# EAGLE board SenseoControl (EAGLE 6.1)
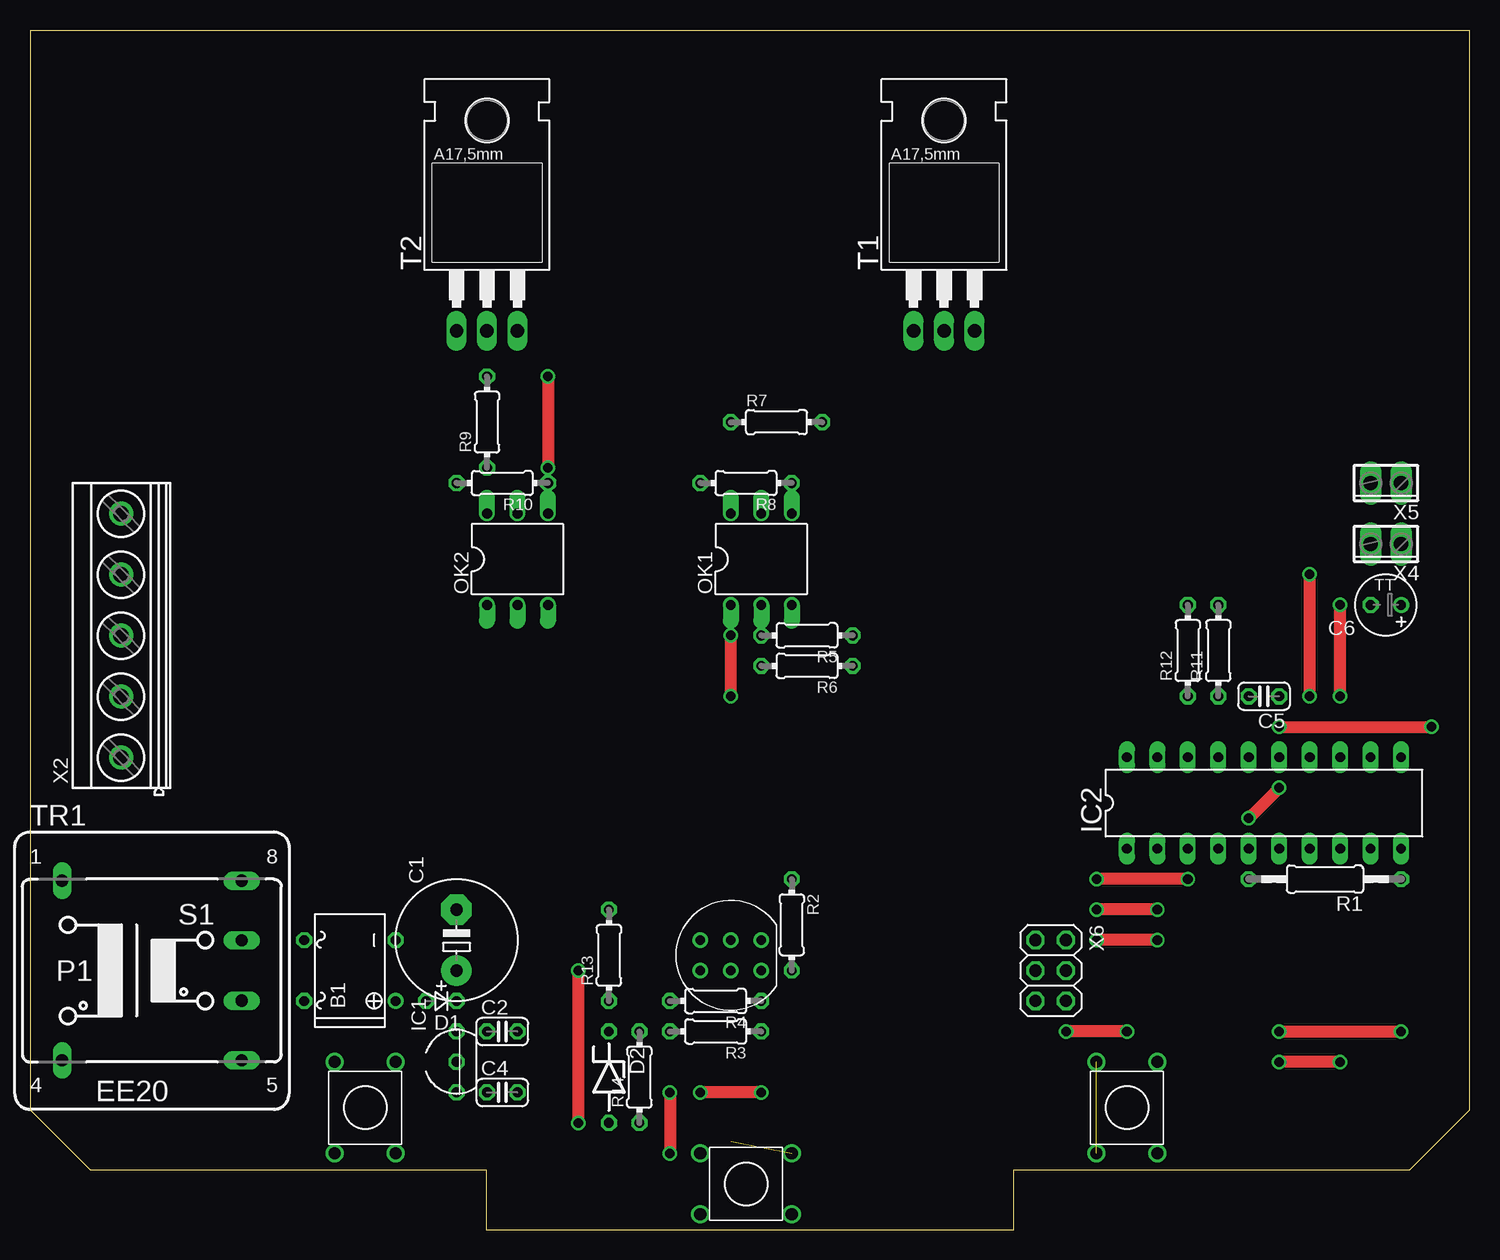
[diagram p0: board, top side]
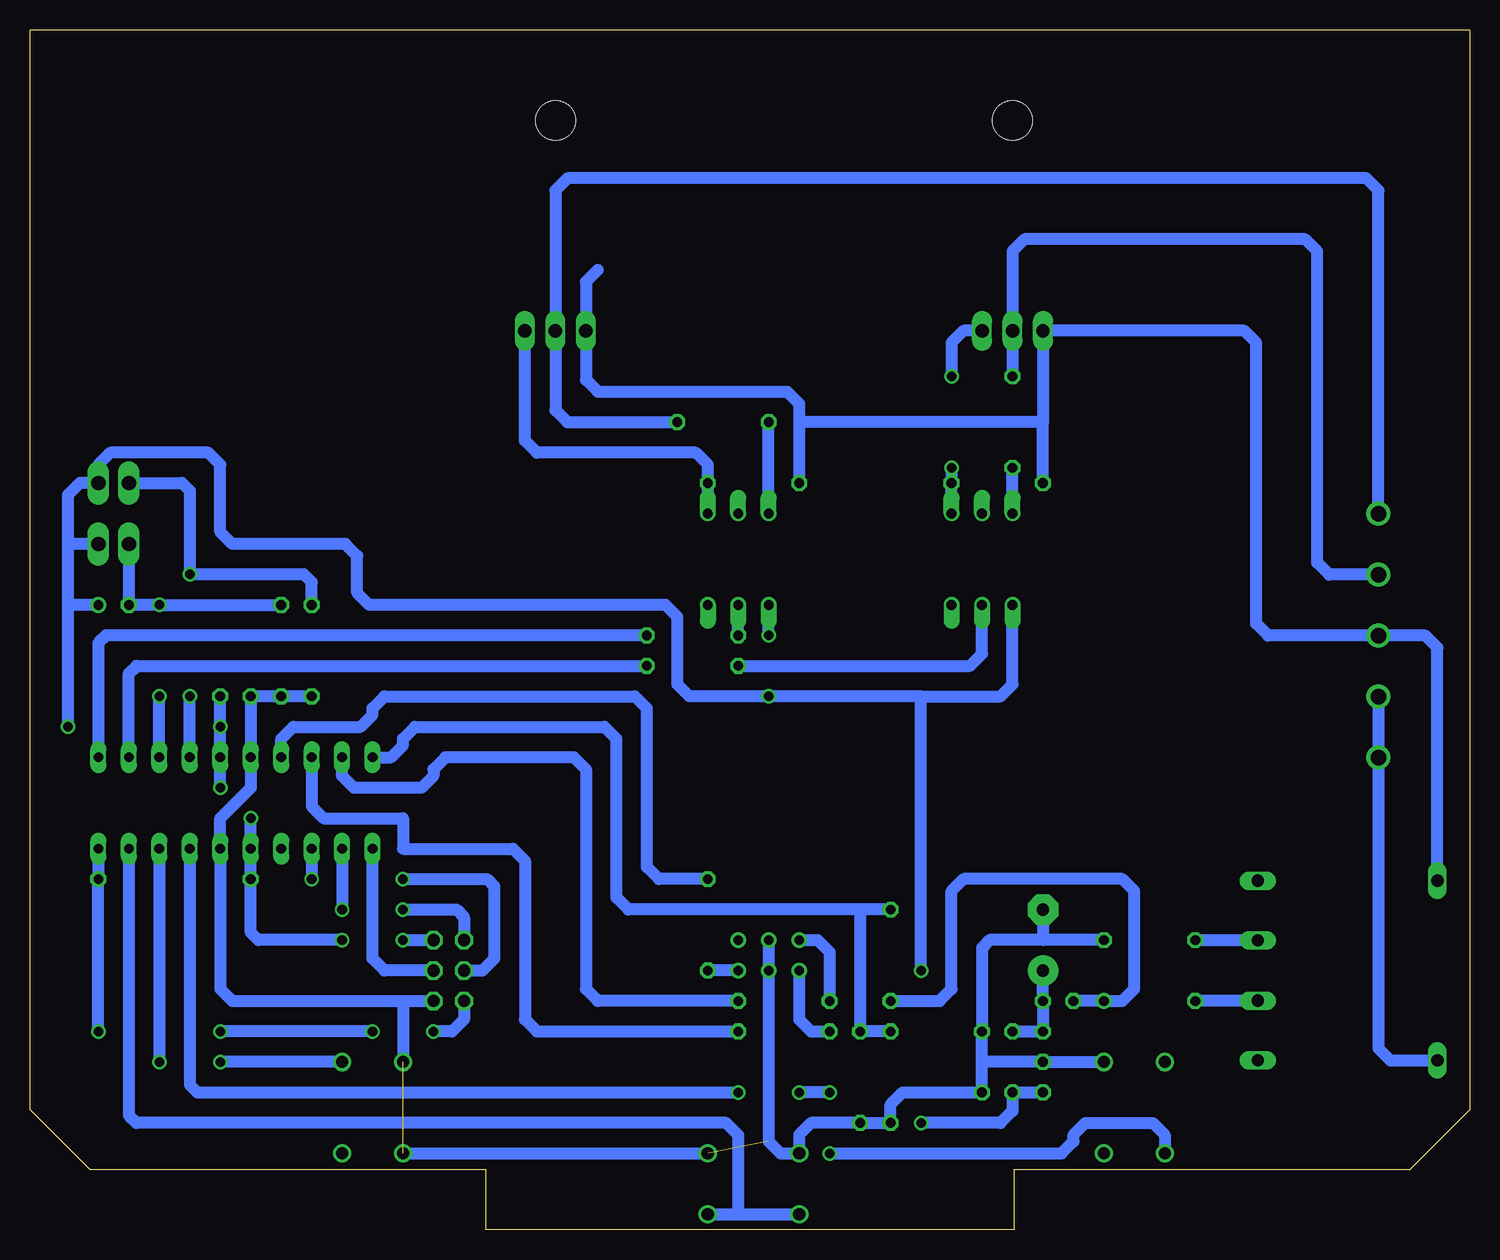
[diagram p1: board, bottom side, seen from below]

Size 120 x 100 mm. Coordinates in mm from the lower left corner, seen from the top.
Outline: 5,5 38,5 38,0 82,0 82,5 115,5 120,10 120,100 0,100 0,10 5,5
Copper layers (1*16): Top 0.035mm / dielectric 1.5mm / Bottom 0.035mm
Design rules: minimum track width 10mil, minimum drill 24mil, track to track 8mil, track to pad 8mil, pad to pad 8mil, via to via 8mil, smd to smd 8mil, copper to edge 40mil, drill to drill 8mil, minimum pad ring 10mil, minimum via ring 8mil, stop-mask expansion 4mil, vias tented up to drill 0mil, thermal gap 10mil
vRestrict: area 76.2,34.3 to 83.8,36.8; area 33,34.3 to 40.6,36.8

## Footprints (pad centres in the part's own frame; a part is rotated, then mirrored left to right if it is on the bottom)
B-DIL = drill 0.813: + -2.54,-3.81 | drill 0.813 octagon: - 2.54,-3.81; AC1 2.54,3.81; AC2 -2.54,3.81
E5-10,5 = drill 1.016 pad 2.54: + -2.54,0 | drill 1.016 pad 2.54 octagon: - 2.54,0
C025-024X044 = drill 0.813 octagon: 1 -1.27,0; 2 1.27,0
TT2D5 = drill 0.813: + -1.27,0 | drill 0.813 octagon: - 1.27,0
D-2.5 = drill 0.813 octagon: A 1.27,0; C -1.27,0
ZDIO-7.5 = drill 0.813 octagon: A 3.81,0; C -3.81,0
TO92-A = drill 0.813 octagon: 1 -2.54,0; 2 0,0; 3 2.54,0
DIL20 = drill 0.813 long: 1 -11.43,-3.81; 2 -8.89,-3.81; 3 -6.35,-3.81; 4 -3.81,-3.81; 5 -1.27,-3.81; 6 1.27,-3.81; 7 3.81,-3.81; 8 6.35,-3.81; 9 8.89,-3.81; 10 11.43,-3.81; 11 11.43,3.81; 12 8.89,3.81; 13 6.35,3.81; 14 3.81,3.81; 15 1.27,3.81; 16 -1.27,3.81; 17 -3.81,3.81; 18 -6.35,3.81; 19 -8.89,3.81; 20 -11.43,3.81
LF5 = drill 0.8: 1 1.27,2.54; 2 1.27,-2.54; 3 -1.27,-2.54; 4 -1.27,2.54; 5 1.27,0; 6 -1.27,0
DIL06 = drill 0.813 offset: 1 -2.54,-3.81; 2 0,-3.81; 3 2.54,-3.81; 4 2.54,3.81; 5 0,3.81; 6 -2.54,3.81
0207/12 = drill 0.813 octagon: 1 -6.35,0; 2 6.35,0
0204/7 = drill 0.813 octagon: 1 -3.81,0; 2 3.81,0
B3F-10XX-A = drill 1.016: 1 -3.81,2.54; 2 3.81,2.54; 3 -3.81,-2.54; 4 3.81,-2.54
TO220AB = drill 1.118 long: 1 -2.54,-6.35; 2 0,-6.35; 3 2.54,-6.35 | hole 3.302: 0,11.176
EE20-1 = drill 1.016 long: 1 -7.493,7.493; 4 -7.493,-7.493; 5 7.493,-7.493; 6 7.493,-2.515; 7 7.493,2.515; 8 7.493,7.493
MKDSN1,5/5-5,08 = drill 1.3 pad 2: 1 -10.181,0.025; 2 -5.101,0.025; 3 -0.021,0.025; 4 5.059,0.025; 5 10.139,0.025
2POL254 = drill 1.2 long: 1 -1.27,0; 2 1.27,0
2X03 = drill 1.016 octagon: 1 -2.54,-1.27; 2 -2.54,1.27; 3 0,-1.27; 4 0,1.27; 5 2.54,-1.27; 6 2.54,1.27

## Placement (x,y rotation side)
B1  B500D  [B-DIL]  26.67,21.59 90 top
C1  470µ  [E5-10,5]  35.56,24.13 90 top
C2  100n  [C025-024X044]  39.37,16.51 0 top
C4  100n  [C025-024X044]  39.37,11.43 0 top
C5  100n  [C025-024X044]  102.87,44.45 180 top
C6  1µ  [TT2D5]  113.03,52.07 180 top
D1  1N4004  [D-2.5]  34.29,19.05 180 top
D2  5V1  [ZDIO-7.5]  48.26,12.7 270 top
IC1  78L05  [TO92-A]  35.56,13.97 90 top
IC2  TINY26P  [DIL20]  102.87,35.56 0 top
LED1  LF5  [LF5]  58.42,22.86 270 top
OK1  MOC3031M  [DIL06]  60.96,55.88 0 top
OK2  MOC3031M  [DIL06]  40.64,55.88 0 top
R1  10k  [0207/12]  107.95,29.21 180 top
R2  150  [0204/7]  63.5,25.4 270 top
R3  20  [0204/7]  57.15,16.51 180 top
R4  120  [0204/7]  57.15,19.05 180 top
R5  150  [0204/7]  64.77,49.53 180 top
R6  150  [0204/7]  64.77,46.99 180 top
R7  1k  [0204/7]  62.23,67.31 0 top
R8  1k  [0204/7]  59.69,62.23 180 top
R9  1k  [0204/7]  38.1,67.31 90 top
R10  1k  [0204/7]  39.37,62.23 180 top
R11  10k  [0204/7]  99.06,48.26 90 top
R12  1k  [0204/7]  96.52,48.26 90 top
R13  100k  [0204/7]  48.26,22.86 90 top
R14  100k  [0204/7]  50.8,12.7 90 top
S1  POWER  [B3F-10XX-A]  59.69,3.81 0 top
S2  1 CUP  [B3F-10XX-A]  91.44,10.16 90 top
S3  2 CUPS  [B3F-10XX-A]  27.94,10.16 270 top
T1  BT136  [TO220AB]  76.2,81.28 0 top
T2  BT136  [TO220AB]  38.1,81.28 0 top
TR1  230V/6V 0.35VA  [EE20-1]  10.16,21.59 0 top
X2  MKDSN1,5/5-5,08  [MKDSN1,5/5-5,08]  7.62,49.53 90 top
X4  Hall-Switch  [2POL254]  113.03,57.15 180 top
X5  NTC  [2POL254]  113.03,62.23 180 top
X6  ISP  [2X03]  85.09,21.59 270 top

## Library data of the parts
B1 = rectifier
C1 C2 C4-C6 R1-R14 = resistor
D1 D2 = diode
IC1 = linear
IC2 = atmel; MPN: ATTINY261-20PU; OC_FARNELL: 1455146; OC_NEWARK: 58M3782
LED1 = led-rgb
OK1 OK2 = optocoupler; MF: FAIRCHILD SEMICONDUCTOR; MPN: MOC3031M; OC_FARNELL: 9875964; OC_NEWARK: 78K6089
S1-S3 = switch-omron
T1 T2 = triac
TR1 = trafo
X2 = con-phoenix-508; MPN: SMKDSN1,5/5-5,08; OC_FARNELL: 1792906; OC_NEWARK: 70R0301
X4 X5 = con-phoenix-254; OC_FARNELL: unknown; OC_NEWARK: unknown
X6 = pinhead

## Nets
!RESET: IC2.10 R1.1 X6.5
BLACK: R9.2 T2.2 X2.4
BLUE: R8.2 R10.2 T1.1 T2.1 TR1.1 X2.3
BROWN: TR1.4 X2.1 X2.2
GND: B1.- C1.- C2.2 C4.2 C5.2 D2.A IC1.2 IC2.6 IC2.16 LED1.5 LED1.6 R11.1 R12.1 R14.1 S1.1 S1.2 S2.1 S2.2 S3.1 X6.6
MISO: IC2.2 X6.1
MOSI: IC2.1 X6.4
N$1: LED1.2 R3.2
N$2: B1.AC1 TR1.7
N$3: OK1.4 R8.1 T1.3
N$4: B1.AC2 TR1.6
N$5: IC2.18 R3.1
N$6: D2.C IC2.20 R13.2 R14.2
N$7: C1.+ C2.1 D1.C IC1.3
N$8: IC2.7 S3.4
N$9: IC2.8 S2.4
N$10: IC2.9 S1.3 S1.4
N$11: IC2.17 R2.1
N$12: LED1.3 R4.2
N$13: LED1.1 R2.2
N$14: B1.+ D1.A R13.1
N$15: IC2.19 R4.1
N$17: IC2.11 R5.1
N$18: IC2.12 R6.1
N$19: OK1.6 R7.1
N$21: OK2.6 R9.1
N$22: OK2.4 R10.1 T2.3
N$23: OK2.2 R6.2
N$25: OK1.2 R5.2
N$27: C6.- IC2.13 R11.2 X4.2
N$29: IC2.14 R12.2 X5.2
SCK: IC2.3 X6.3
VCC: C4.1 C5.1 C6.+ IC1.1 IC2.5 IC2.15 OK1.1 OK2.1 R1.2 X4.1 X5.1 X6.2
WHITE: R7.2 T1.2 X2.5

## Tracks (layer width: path | path; a pad name or v marks a point on that pad's centre or on a via)
!RESET  (via drill 0.8)
  Top 1.016: v104.14,16.51 v114.3,16.51 | v91.44,16.51 v86.36,16.51
  Bottom 1.016: IC2.10 R1.1 v114.3,16.51 | X6.5 83.82,17.51 84.82,16.51 v86.36,16.51 | v91.44,16.51 v104.14,16.51
BLACK
  Bottom 1.016: R9.2 T2.2 38.1,81.55 37.1,82.55 13.7,82.55 12.7,81.55 12.7,55.59 11.7,54.59 X2.4
BLUE
  Bottom 1.016: TR1.1 2.67,48.51 3.67,49.51 X2.3 16.78,49.51 17.78,50.51 17.78,73.93 18.78,74.93 T2.1 35.56,67.31 | 55.88,67.31 55.88,68.85 56.88,69.85 72.66,69.85 73.66,70.85 T1.1 73.66,79.01 72.66,80.01 | 55.88,67.31 R8.2 | R10.2 35.56,67.31 | 35.56,67.31 55.88,67.31
BROWN
  Bottom 1.016: X2.2 X2.1 7.59,15.1 6.59,14.1 TR1.4
GND  (2 unrouted)
  Bottom 1.016: B1.- 35.56,24.13 | 40.64,13.97 C4.2 47.26,11.43 48.26,10.43 D2.A R14.1 54.88,8.89 55.88,7.89 S1.1 57.42,6.35 58.42,7.35 LED1.5 LED1.6 | 40.64,13.97 C2.2 40.64,23.5 40.01,24.13 35.56,24.13 | R12.1 R11.1 C5.2 IC2.16 101.6,36.83 104.14,34.29 IC2.6 104.14,20.05 103.14,19.05 88.9,19.05 | 40.64,13.97 IC1.2 S3.1 | 88.9,19.05 S2.2 | 88.9,19.05 X6.6 | C1.- 35.56,24.13 | S2.1 S1.2
MISO  (via drill 0.8)
  Top 1.016: v93.98,26.67 v88.9,26.67
  Bottom 1.016: IC2.2 v93.98,26.67 | v88.9,26.67 84.45,26.67 83.82,26.04 X6.1
MOSI
  Bottom 1.016: X6.4 90.44,21.59 91.44,22.59 IC2.1
N$1
  Bottom 1.016: LED1.2 55.88,17.51 54.88,16.51 R3.2
N$2
  Bottom 1.016: B1.AC1 17.68,24.13 TR1.7
N$3
  Bottom 1.016: OK1.4 R8.1 63.5,63.77 64.5,64.77 77.74,64.77 78.74,65.77 T1.3
N$4
  Bottom 1.016: TR1.6 17.68,19.05 B1.AC2
N$5
  Bottom 1.016: IC2.18 96.52,35.29 95.52,34.29 88.9,34.29 88.9,31.75 79.74,31.75 78.74,30.75 78.74,17.51 77.74,16.51 R3.1
N$6
  Bottom 1.016: IC2.20 89.9,39.37 88.9,40.37 88.9,40.91 87.9,41.91 72.12,41.91 71.12,40.91 71.12,27.67 70.12,26.67 50.8,26.67 | D2.C R14.2 50.8,26.67 | R13.2 50.8,26.67
N$7
  Bottom 1.016: C2.1 IC1.3 D1.C C1.+
N$8  (via drill 0.8)
  Top 1.016: v60.96,11.43 v55.88,11.43 | v53.34,11.43 v53.34,6.35
  Bottom 1.016: IC2.7 106.68,12.06 106.05,11.43 v60.96,11.43 | 55.61,11.43 v55.88,11.43 v53.34,11.43 | v53.34,6.35 34.02,6.35 33.02,7.35 33.02,7.89 32.02,8.89 26.4,8.89 25.4,7.89 S3.4
N$9  (via drill 0.8)
  Top 1.016: v109.22,13.97 v104.14,13.97
  Bottom 1.016: IC2.8 v109.22,13.97 | S2.4 v104.14,13.97
N$10
  Bottom 1.016: IC2.9 111.76,9.53 111.12,8.89 61.96,8.89 60.96,7.89 60.96,1.27 | 60.96,1.27 S1.3 | S1.4 60.96,1.27
N$11
  Bottom 1.016: IC2.17 99.06,40.91 98.06,41.91 92.44,41.91 91.44,42.91 91.44,43.45 90.44,44.45 69.58,44.45 68.58,43.45 68.58,30.21 67.58,29.21 R2.1
N$12
  Bottom 1.016: LED1.3 54.34,24.13 53.34,23.13 R4.2
N$13
  Bottom 1.016: LED1.1 R2.2
N$14
  Bottom 1.016: R13.1 44.18,19.05 43.18,20.05 43.18,28.21 42.18,29.21 28.94,29.21 27.94,28.21 27.94,20.05 28.94,19.05 B1.+ D1.A
N$15
  Bottom 1.016: R4.1 72.66,19.05 73.66,20.05 73.66,38.37 74.66,39.37 85.36,39.37 86.36,38.37 86.36,37.83 87.36,36.83 92.98,36.83 93.98,37.83 IC2.19
N$17
  Bottom 1.016: IC2.11 114.3,48.9 113.67,49.53 R5.1
N$18
  Bottom 1.016: IC2.12 111.76,46.35 111.12,46.99 R6.1
N$19
  Bottom 1.016: OK1.6 R7.1
N$21
  Bottom 1.016: OK2.6 R9.1
N$22  (via drill 0.8)
  Top 1.016: v43.18,71.12 v43.18,63.5
  Bottom 1.016: OK2.4 R10.1 v43.18,63.5 | T2.3 42.18,74.93 43.18,73.93 v43.18,71.12
N$23
  Bottom 1.016: R6.2 41.64,46.99 40.64,47.99 OK2.2
N$25
  Bottom 1.016: R5.2 OK1.2
N$27  (via drill 0.8)
  Top 1.016: v109.22,44.45 v109.22,52.07
  Bottom 1.016: X4.2 C6.- v109.22,52.07 R11.2 | IC2.13 v109.22,44.45
N$29  (via drill 0.8)
  Top 1.016: v106.68,44.45 v106.68,54.61
  Bottom 1.016: IC2.14 v106.68,44.45 | X5.2 107.31,62.23 106.68,61.59 v106.68,54.61 97.16,54.61 96.52,53.98 R12.2
SCK  (via drill 0.8)
  Top 1.016: v96.52,29.21 v88.9,29.21
  Bottom 1.016: IC2.3 v96.52,29.21 | v88.9,29.21 81.92,29.21 81.28,28.57 81.28,22.59 82.28,21.59 X6.3
VCC  (via drill 0.8)
  Top 1.016: v93.98,24.13 v88.9,24.13 | v101.6,34.29 v104.14,36.83 | v104.14,41.91 v116.84,41.91 | v58.42,44.45 v58.42,49.53 | v45.72,8.89 v45.72,21.59
  Bottom 1.016: IC1.1 C4.1 38.1,9.89 39.1,8.89 v45.72,8.89 | v93.98,24.13 100.97,24.13 101.6,24.77 R1.2 IC2.5 v101.6,34.29 | v88.9,24.13 X6.2 | v104.14,36.83 IC2.15 v104.14,41.91 C5.1 | 45.72,44.45 v58.42,44.45 65.04,44.45 66.04,45.45 66.04,51.07 67.04,52.07 91.71,52.07 92.71,53.07 92.71,56.15 93.71,57.15 103.14,57.15 104.14,58.15 104.14,63.77 105.14,64.77 113.3,64.77 114.3,63.77 X5.1 115.84,62.23 116.84,61.23 116.84,57.15 | v45.72,21.59 45.72,44.45 | 116.84,57.15 116.84,52.07 | 116.84,52.07 v116.84,41.91 | X4.1 116.84,57.15 | C6.+ 116.84,52.07 | 45.72,44.45 39.1,44.45 38.1,45.45 OK2.1 | v58.42,49.53 OK1.1
WHITE
  Bottom 1.016: R7.2 75.2,67.31 76.2,68.31 T1.2 76.2,86.63 75.2,87.63 8.6,87.63 7.59,86.63 X2.5